# Altium PCB ModdedTSPCB.PcbDoc
Units mm, origin at the board's own origin, x right, y up, seen from the top; angles counter-clockwise.
Board outline 50 x 67 mm, 2 copper layers (Top Layer, Bottom Layer); 51 components, 34 nets, 117 pads, 1 vias.
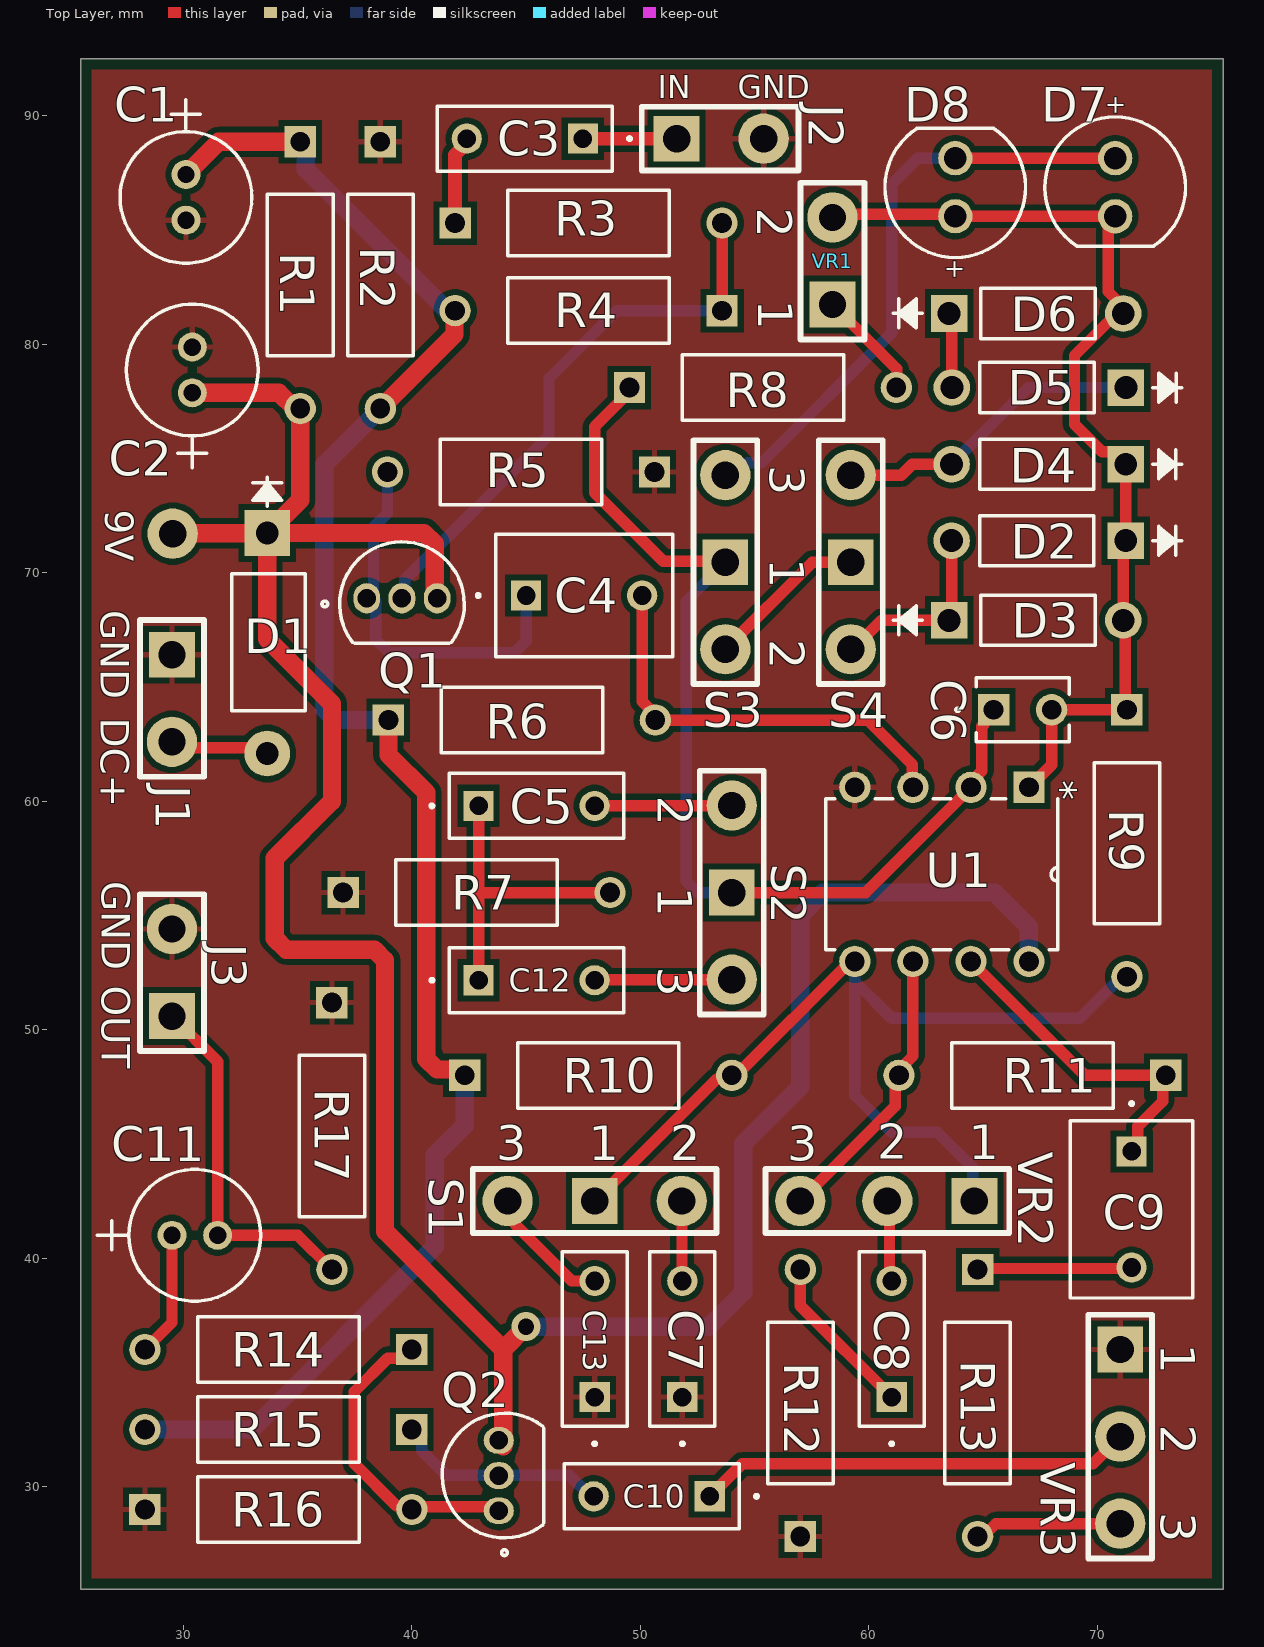
[diagram p0: Top Layer view]
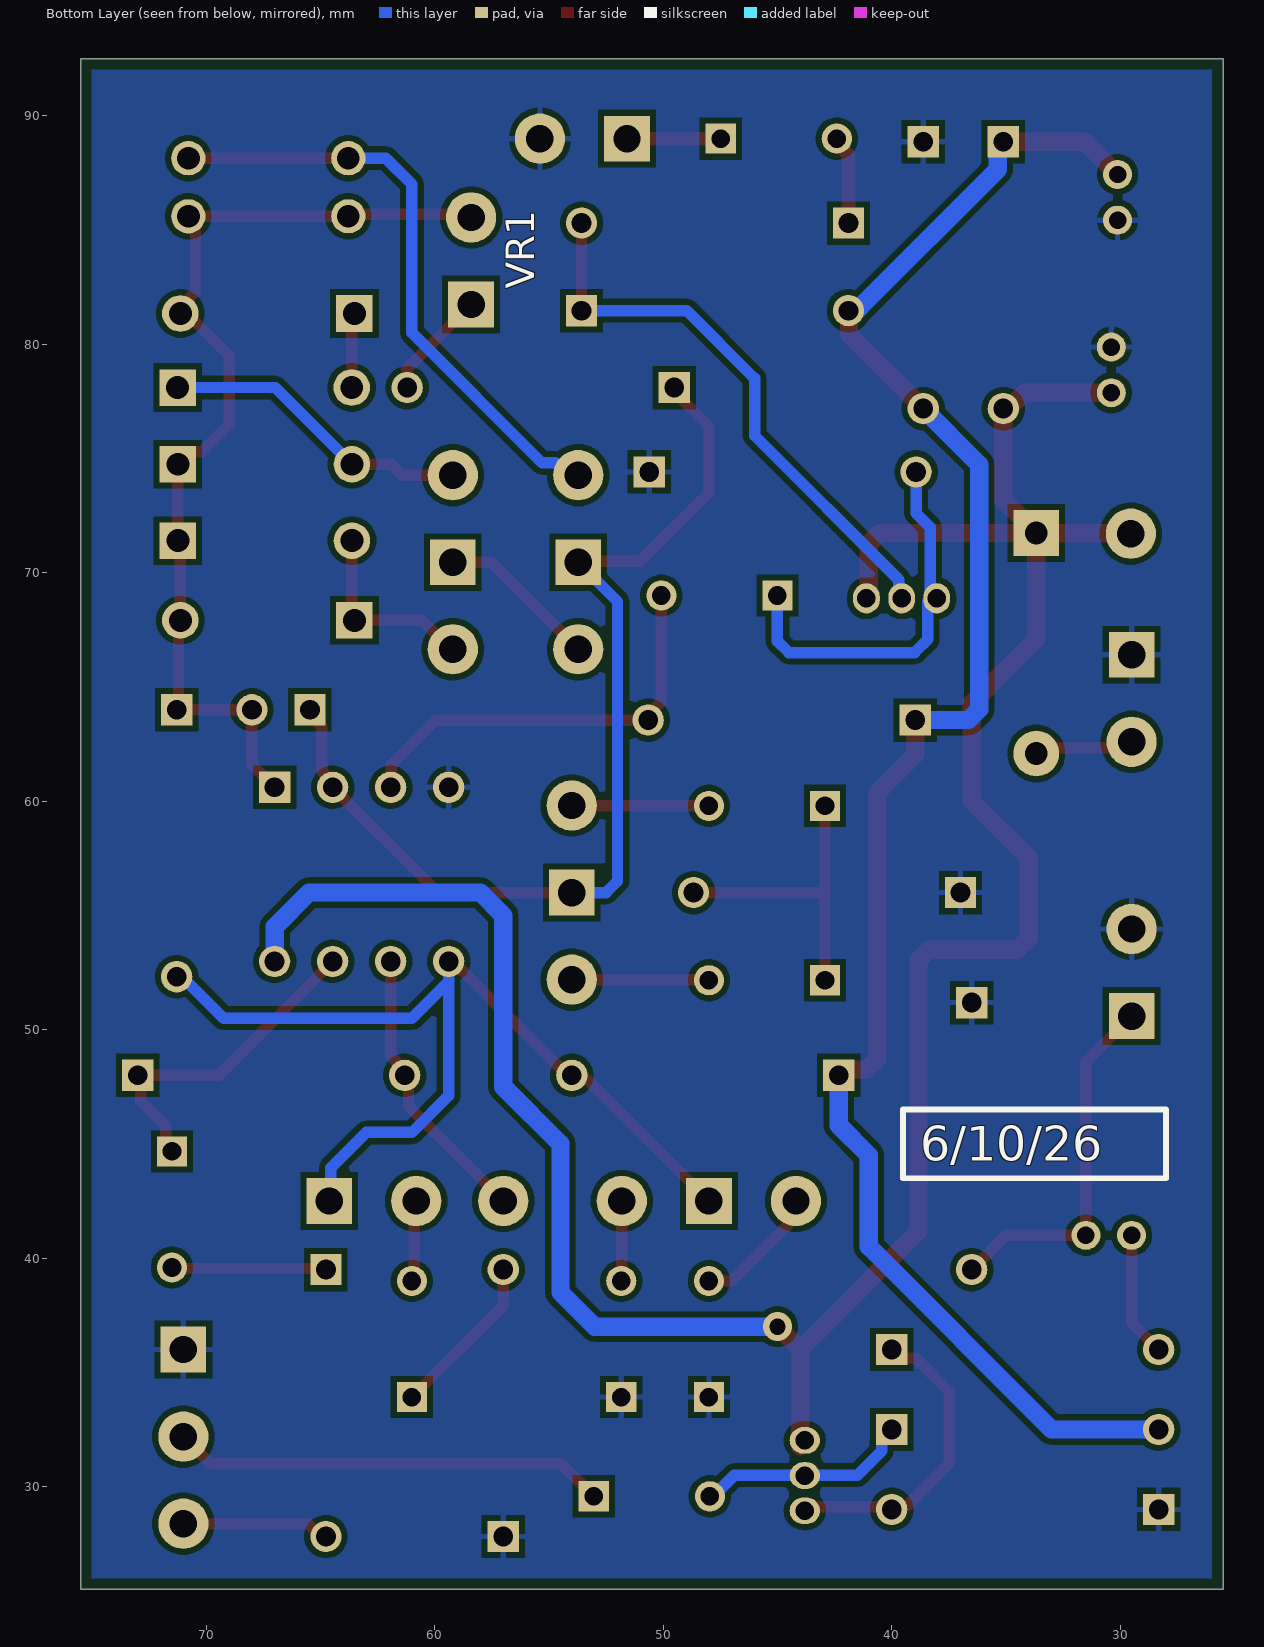
[diagram p1: Bottom Layer view, seen from below]
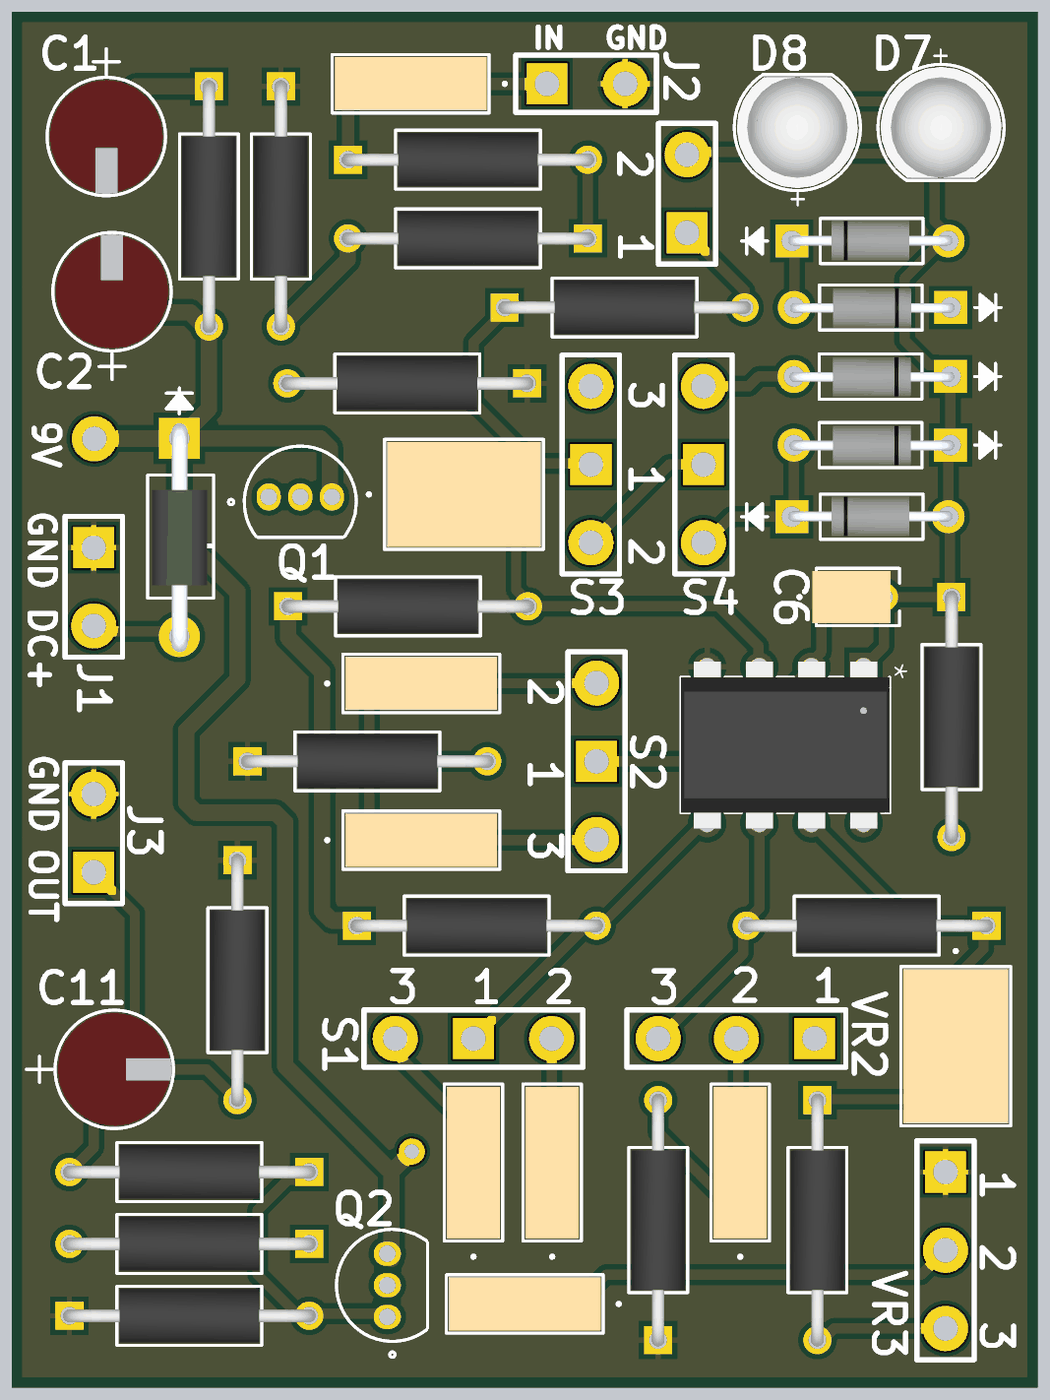
[diagram p2: 3D render of the assembled board from above, using the file's embedded part models]

## Layer stack, top to bottom
Top Solder: solder mask 0.0102, Solder Resist, Dk 3.5
Top Layer: signal copper 0.0356
Dielectric 1: dielectric 0.32, FR-4, Dk 4.8
Bottom Layer: signal copper 0.0356
Bottom Solder: solder mask 0.0102, Solder Resist, Dk 3.5

## Board outline
25.5,25.5 25.5,92.5 75.5,92.5 75.5,25.5

## Design rules (kind name [scope] priority, off if disabled: settings)
BoardOutlineClearance [All] p1: gap=0.381 ignorepadtopadclearanceinfootprint=FALSE
Clearance [All] p1: gap=0.254 ignorepadtopadclearanceinfootprint=FALSE
HoleSize [All] p1: absolutevalues=TRUE maxlimit=2.54 minlimit=0.254 maxpercent=80.000 minpercent=20.000
MinimumAnnularRing [All] p1: minimumring=0.127
PolygonConnect [All] p1: connectstyle=Relief reliefconductorwidth=0.254 reliefentries=4 polygonreliefangle="90 Angle" airgapwidth=0.254
RoutingVias [All] p1: holewidth=0.711 width=1.27 viastyle="Through Hole" minholewidth=0.711 minwidth=1.27 maxholewidth=0.711 maxwidth=1.27
SolderMaskExpansion [All] p1: expansion=0.102 istentingtop=FALSE
SupplyNets "Schematic Supply Nets" [InNet('GND')] p1: voltage=0.000
Width [All] p1: maxlimit=1 minlimit=0.254 preferedwidth=0.5
29 further rules are at their usual default settings.

## Components (designator, comment, footprint, x,y, rotation, side; value= is the part's Value field where it differs from the comment)
C1 "47uF" CAP_35YXJ47M5X11 30.113,87.428 r270 top
C2 "100uF" CAP_25PX100MEFC5X11 30.39,77.873 r90 top
C3 "22nF" CAP_R82EC2220SH50J 47.482,88.996 r180 top
C4 "1uF" CAP_R82DC4100AA60K 45,69 r0 top
C5 "47nF" CAP_R82EC2470SH60J 42.92,59.793 r0 top
C6 "51pF" CAP_C315C510K3G5TA 65.46,64 r0 top
C7 "220nF" CAP_R82DC3220Z360J 51.837,33.92 r90 top
C8 "220nF" CAP_R82DC3220Z360J 61,33.92 r90 top
C9 "1uF" CAP_R82DC4100AA60K 71.5,44.669 r270 top
C10 "100nF" CAP_R82DC3100AA50K 53.038,29.576 r180 top
C11 "10uF" CAP_63PX10MEFC5X11 29.5,41 r0 top
C12 "82nF" CAP_R82EC2820SH60J 42.92,52.162 r0 top
C13 "47nF" CAP_R82EC2470SH60J 48,33.92 r90 top
D1 "1N4007" DIODE_1N4007FFG 33.67,71.735 r270 top
D2 "1N4148" DIODE_1N4148-T50R 71.243,71.4 r180 top
D3 "1N4148" DIODE_1N4148-T50R 63.513,67.914 r0 top
D4 "1N4148" DIODE_1N4148-T50R 71.243,74.742 r180 top
D5 "1N4148" DIODE_1N4148-T50R 71.253,78.103 r180 top
D6 "1N4148" DIODE_1N4148-T50R 63.513,81.344 r0 top
D7 "Red, 2.1V, 60°" LED_151051RS11000 70.782,86.869 r270 top
D8 "Red, 2.1V, 60°" LED_151051RS11000 63.782,86.869 r90 top
J1 "2.1mm DC Jack" DC_POWER_JACK_OFFBOARD 29.5,64.5 r90 top
J2 "Input Jack" JACK_MONO_OFFBOARD 53.49,88.996 r180 top
J3 "Output Jack" JACK_MONO_OFFBOARD 29.5,52.5 r270 top
Q1 "2N5089" BJT_2N5089 38.295,68.876 r0 top
Q2 "2N5089" BJT_2N5089 43.803,29.213 r90 top
R1 "10K" R_MFR-25FRF52-10K 35.115,88.865 r270 top
R2 "10K" R_MFR-25FRF52-10K 38.619,88.865 r270 top
R3 "1K" R_MFR-25FRF52-1K 41.891,85.301 r0 top
R4 "510K" R_MFR-25FTE52-510K 53.575,81.469 r180 top
R5 "10K" R_MFR-25FRF52-10K 50.617,74.407 r180 top
R6 "10K" R_MFR-25FRF52-10K 38.973,63.548 r0 top
R7 "4.7K" R_MFR-25FTE52-4K7 36.989,56 r0 top
R8 "51K" R_MFR-25FTE52-51K 49.521,78.103 r0 top
R9 "1K" R_MFR-25FRF52-1K 71.294,64 r270 top
R10 "10K" R_MFR-25FRF52-10K 42.316,48 r0 top
R11 "1K" R_MFR-25FRF52-1K 73,48 r180 top
R12 "220" R_MFR-25FTE52-220R 57,27.816 r90 top
R13 "1K" R_MFR-25FRF52-1K 64.76,39.5 r270 top
R14 "100" R_MFR-25FRF52-100R 40,36 r180 top
R15 "510K" R_MFR-25FTE52-510K 40,32.5 r180 top
R16 "10K" R_MFR-25FRF52-10K 28.316,29 r0 top
R17 "10K" R_MFR-25FRF52-10K 36.5,51.184 r270 top
S1 "SPDT_TOGGLE_SWITCH_OFFBOARD" SPDT_TOGGLE_SWITCH_OFFBOARD 48,42.5 r0 top (schematic designator SPDT1)
S2 "SPDT_TOGGLE_SWITCH_OFFBOARD" SPDT_TOGGLE_SWITCH_OFFBOARD 54,56 r90 top (schematic designator SPDT2)
S3 "SPDT_TOGGLE_SWITCH_OFFBOARD" SPDT_TOGGLE_SWITCH_OFFBOARD 53.72,70.457 r270 top (schematic designator SPDT3)
S4 "SPDT_TOGGLE_SWITCH_OFFBOARD" SPDT_TOGGLE_SWITCH_OFFBOARD 59.207,70.457 r270 top (schematic designator SPDT4)
U1 "RC4558IP" OPAMP_RC4558IP 59.388,52.986 r270 top
VR1 "A500K" POT_500K_LOG_OFFBOARD 58.409,83.64 r90 top
VR2 "B20K" POT_20K_LIN_OFFBOARD 60.81,42.5 r180 top
VR3 "B100K" POT_100K_LIN_OFFBOARD 71,32.19 r270 top

## Footprints (in the part's own frame and the unit in brackets; to place one, negate y for a bottom-side part, rotate by r counter-clockwise, add the part's x,y. Pads: shape width x height; smd on the part's side, far side on the other; paste and mask are expansions set on the pad)
BJT_2N5089 [mil] "Bipolar (BJT) Transistor NPN 25 V 50 mA 50MHz 625 mW Through Hole TO-92-3"
  oval 46x52 hole 32 paste-99999 mask+0: 1(-10.63,0) 2(50,0) 3(110.63,0)
  silkscreen extent -88,-78 158,97
CAP_25PX100MEFC5X11 [mil] "100 µF 25 V Aluminum Electrolytic Capacitors Radial, Can 1000 Hrs @ 105°C"
  round 50 / inner round 60 / far side round 50 hole 30 paste-99999 mask+0: 1(0,0) 2(78.74,0)
  silkscreen extent -129,-114 153,114, body extent -69,-108 149,108, height 493
CAP_35YXJ47M5X11 [mil] "47 µF 35 V Aluminum Electrolytic Capacitors Radial, Can 5000 Hrs @ 105°C"
  round 50 hole 30 paste-99999 mask+0: 1(0,0) 2(78.74,0)
  silkscreen extent -129,-113 153,114, body extent -69,-108 149,108, height 493
CAP_63PX10MEFC5X11 [mil] "10 µF 63 V Aluminum Electrolytic Capacitors Radial, Can 1000 Hrs @ 105°C"
  round 50 hole 30 paste-99999 mask+0: 1(0,0) 2(78.74,0)
  silkscreen extent -129,-113 153,113, body extent -69,-108 149,108, height 493
CAP_C315C510K3G5TA [mil] "51 pF ±10% 25V Ceramic Capacitor C0G, NP0 Radial"
  rect 54x54 hole 34 paste-99999 mask+0: 1(0,0)
  round 54 hole 34 paste-99999 mask+0: 2(100,0)
  silkscreen extent -65,-55 130,55, body extent -37,-50 113,50, height 180
CAP_R82DC3100AA50K [mil] "0.1 µF Film Capacitor 40V 63V Polyester, Polyethylene Terephthalate (PET), Metallized - Stacked Radial"
  rect 52x52 hole 32 paste-99999 mask+0: 1(0,0)
  round 52 hole 32 paste-99999 mask+0: 2(200,0)
  silkscreen extent -84,-56 250,56, body extent -46,-51 246,51, height 260
CAP_R82DC3220Z360J [mil] "0.22 µF Film Capacitor 40V 63V Polyester, Polyethylene Terephthalate (PET), Metallized - Stacked Radial"
  rect 52x52 hole 32 paste-99999 mask+0: 1(0,0)
  round 52 hole 32 paste-99999 mask+0: 2(200,0)
  silkscreen extent -83,-56 250,56, body extent -46,-51 246,51, height 260
CAP_R82DC4100AA60K [mil] "1 µF Film Capacitor 40V 63V Polyester, Polyethylene Terephthalate (PET), Metallized - Stacked Radial"
  rect 52x52 hole 32 paste-99999 mask+0: 1(0,0)
  round 52 hole 32 paste-99999 mask+0: 2(200,0)
  silkscreen extent -85,-106 252,105, body extent -47,-101 247,101, height 398
CAP_R82EC2220SH50J [mil] "0.022 µF Film Capacitor 63V 100V Polyester, Polyethylene Terephthalate (PET), Metallized - Stacked Radial"
  rect 52x52 hole 32 paste-99999 mask+0: 1(0,0)
  round 52 hole 32 paste-99999 mask+0: 2(200,0)
  silkscreen extent -84,-56 251,56, body extent -46,-51 246,51, height 260
CAP_R82EC2470SH60J [mil] "0.047 µF Film Capacitor 63V 100V Polyester, Polyethylene Terephthalate (PET), Metallized - Stacked Radial"
  rect 52x52 hole 32 paste-99999 mask+0: 1(0,0)
  round 52 hole 32 paste-99999 mask+0: 2(200,0)
  silkscreen extent -83,-56 250,56, body extent -46,-51 246,51, height 260
CAP_R82EC2820SH60J [mil] "0.082 µF Film Capacitor 63V 100V Polyester, Polyethylene Terephthalate (PET), Metallized - Stacked Radial"
  rect 52x52 hole 32 paste-99999 mask+0: 1(0,0)
  round 52 hole 32 paste-99999 mask+0: 2(200,0)
  silkscreen extent -83,-56 250,56, body extent -46,-51 246,51, height 260
DC_POWER_JACK_OFFBOARD [mm] "Through holes for wires to Power Barrel Connector Jack 2.10mm ID (0.083\"), 5.50mm OD (0.217\") Chassis Mount"
  rect 2x2 hole 1.2: 1(1.905,0)
  round 2.2 hole 1.2: 2(-1.905,0)
  silkscreen extent -3.43,-1.4 3.43,1.4
DIODE_1N4007FFG [mm] "Diode 1000 V 1A Through Hole Axial"
  rect 2x2 / inner oval 1.925x1.524 / far side rect 2x2 hole 1 paste-2539.97 mask+0: 1(0,0)
  round 2 / inner round 1.524 / far side round 2 hole 1 paste-2539.97 mask+0: 2(9.652,0)
  silkscreen extent -2.45,-1.54 7.78,1.67, body extent -0.73,-1.34 10.42,1.36, height 2.69
DIODE_1N4148-T50R [mil] "Diode 100 V 200mA Through Hole DO-35"
  rect 63x63 / inner round 60 / far side rect 63x63 hole 39.37 paste-99999 mask+0: 1(0,0)
  round 63 / inner round 60 / far side round 63 hole 39.37 paste-99999 mask+0: 2(300,0)
  silkscreen extent -97,-43 252,43, body extent -7,-37 308,38, height 75
JACK_MONO_OFFBOARD [mm] "Through holes for wires to 6.35mm (0.250\", 1/4\") - Headphone Phone Jack Mono Connector Solder Eyelet(s)"
  rect 2x2 hole 1.2: 1(1.905,0)
  round 2.2 hole 1.2: 2(-1.905,0)
  silkscreen extent -3.43,-1.4 3.43,1.4
LED_151051RS11000 [mm] "Red 645nm LED Indication - Discrete 2.1V Radial"
  round 1.5 hole 1: 1(-1.27,0) 2(1.27,0)
  silkscreen extent -3.07,-3.07 2.58,3.08, body extent -2.95,-2.95 2.45,2.95, height 9.2
OPAMP_RC4558IP [mil] "Standard (General Purpose) Amplifier 2 Circuit Differential 8-PDIP"
  rect 54x54 / inner round 60 / far side rect 54x54 hole 34 paste-99999 mask-27: 1(-300,300)
  round 54 / inner round 60 / far side round 54 hole 34 paste-99999 mask-27: 2(-300,200) 3(-300,100) 4(-300,0) 5(0,0) 6(0,100) 7(0,200) 8(0,300)
  silkscreen extent -280,-50 -20,350, body extent -310,-50 10,350, height 205
POT_20K_LIN_OFFBOARD [mm] "Through holes for wires to B20K, 16mm Potentiometers - 18T Knurled Shaft - Solder Lug"
  rect 2x2 hole 1.2: 1(-3.81,0)
  round 2.2 hole 1.2: 2(0,0) 3(3.81,0)
  silkscreen extent -5.33,-1.4 5.33,1.4
POT_100K_LIN_OFFBOARD [mm] "Through holes for wires to B100K, 16mm Potentiometers - 18T Knurled Shaft - Solder Lug"
  rect 2x2 hole 1.2: 1(-3.81,0)
  round 2.2 hole 1.2: 2(0,0) 3(3.81,0)
  silkscreen extent -5.33,-1.4 5.33,1.4
POT_500K_LOG_OFFBOARD [mm] "Through holes for wires to A500K, 16mm Potentiometers - 18T Knurled Shaft - Solder Lug"
  rect 2x2 hole 1.2: 1(-1.905,0)
  round 2.2 hole 1.2: 2(1.905,0)
  silkscreen extent -3.43,-1.4 3.43,1.4
R_MFR-25FRF52-1K [mil] "1 kOhms ±1% 0.25W, 1/4W Through Hole Resistor Axial Metal Film"
  rect 54x54 / inner round 60 / far side rect 54x54 hole 34 paste-99999 mask+0: 1(0,0)
  round 54 / inner round 60 / far side round 54 hole 34 paste-99999 mask+0: 2(460,0)
  silkscreen extent 91,-56 369,57, body extent -12,-51 472,51, height 103
R_MFR-25FRF52-10K [mil] "10 kOhms ±1% 0.25W, 1/4W Through Hole Resistor Axial Metal Film"
  rect 54x54 / inner round 60 / far side rect 54x54 hole 34 paste-99999 mask+0: 1(0,0)
  round 54 / inner round 60 / far side round 54 hole 34 paste-99999 mask+0: 2(460,0)
  silkscreen extent 91,-57 369,56, body extent -12,-51 472,51, height 103
R_MFR-25FRF52-100R [mil] "100 Ohms ±1% 0.25W, 1/4W Through Hole Resistor Axial Metal Film"
  rect 54x54 / inner round 60 / far side rect 54x54 hole 34 paste-99999 mask+0: 1(0,0)
  round 54 / inner round 60 / far side round 54 hole 34 paste-99999 mask+0: 2(460,0)
  silkscreen extent 91,-56 369,57, body extent -12,-51 472,51, height 103
R_MFR-25FTE52-4K7 [mil] "4.7 kOhms ±1% 0.25W, 1/4W Through Hole Resistor Axial Metal Film"
  rect 54x54 / inner round 60 / far side rect 54x54 hole 34 paste-99999 mask+0: 1(0,0)
  round 54 / inner round 60 / far side round 54 hole 34 paste-99999 mask+0: 2(460,0)
  silkscreen extent 91,-56 369,57, body extent -12,-51 472,51, height 103
R_MFR-25FTE52-51K [mil] "51 kOhms ±1% 0.25W, 1/4W Through Hole Resistor Axial Metal Film"
  rect 54x54 / inner round 60 / far side rect 54x54 hole 34 paste-99999 mask+0: 1(0,0)
  round 54 / inner round 60 / far side round 54 hole 34 paste-99999 mask+0: 2(460,0)
  silkscreen extent 91,-57 369,56, body extent -12,-51 472,51, height 103
R_MFR-25FTE52-220R [mil] "220 Ohms ±1% 0.25W, 1/4W Through Hole Resistor Axial Metal Film"
  rect 54x54 / inner round 60 / far side rect 54x54 hole 34 paste-99999 mask+0: 1(0,0)
  round 54 / inner round 60 / far side round 54 hole 34 paste-99999 mask+0: 2(460,0)
  silkscreen extent 91,-56 369,57, body extent -12,-51 472,51, height 103
R_MFR-25FTE52-510K [mil] "510 kOhms ±1% 0.25W, 1/4W Through Hole Resistor Axial Metal Film"
  rect 54x54 / inner round 60 / far side rect 54x54 hole 34 paste-99999 mask+0: 1(0,0)
  round 54 / inner round 60 / far side round 54 hole 34 paste-99999 mask+0: 2(460,0)
  silkscreen extent 91,-57 369,56, body extent -12,-51 472,51, height 103
SPDT_TOGGLE_SWITCH_OFFBOARD [mm] "Through holes for wires to a Toggle Switch SPDT Panel Mount"
  rect 2x2 hole 1.2: 1(0,0)
  round 2.2 hole 1.2: 2(3.81,0) 3(-3.81,0)
  silkscreen extent -5.33,-1.4 5.33,1.4

## Part data
C1: library part 35YXJ47M5X11, "47 µF 35 V Aluminum Electrolytic Capacitors Radial, Can 5000 Hrs @ 105°C", Manufacturer_Name=Rubycon, Copyright="Copyright (C) 2026 Ultra Librarian. All rights reserved.", Manufacturer_Part_Number=35YXJ47M5X11
C2: library part 25PX100MEFC5X11, "100 µF 25 V Aluminum Electrolytic Capacitors Radial, Can 1000 Hrs @ 105°C", Manufacturer_Name=Rubycon, Copyright="Copyright (C) 2025 Ultra Librarian. All rights reserved.", Manufacturer_Part_Number=25PX100MEFC5X11
C3: library part R82EC2220SH50J, "0.022 µF Film Capacitor 63V 100V Polyester, Polyethylene Terephthalate (PET), Metallized - Stacked Radial", Manufacturer_Name=Kemet, Copyright="Copyright (C) 2026 Ultra Librarian. All rights reserved.", Datasheet=https://content.kemet.com/datasheets/KEM_F3101_R82.pdf, Manufacturer_Part_Number=R82EC2220SH50J, Type="Film Capacitor"
C4 C9: library part R82DC4100AA60K, "1 µF Film Capacitor 40V 63V Polyester, Polyethylene Terephthalate (PET), Metallized - Stacked Radial", Manufacturer_Name=Kemet, Copyright="Copyright (C) 2026 Ultra Librarian. All rights reserved.", Manufacturer_Part_Number=R82DC4100AA60K, Type="Film Capacitor"
C5 C13: library part R82EC2470SH60J, "0.047 µF Film Capacitor 63V 100V Polyester, Polyethylene Terephthalate (PET), Metallized - Stacked Radial", Manufacturer_Name=Kemet, Copyright="Copyright (C) 2026 Ultra Librarian. All rights reserved.", Datasheet=https://content.kemet.com/datasheets/KEM_F3101_R82.pdf, Manufacturer_Part_Number=R82EC2470SH60J, Type="Film Capacitor"
C6: library part C315C510K3G5TA, "51 pF ±10% 25V Ceramic Capacitor C0G, NP0 Radial", Manufacturer_Name=Kemet, Copyright="Copyright (C) 2026 Ultra Librarian. All rights reserved.", Manufacturer_Part_Number=C315C510K3G5TA
C7 C8: library part R82DC3220Z360J, "0.22 µF Film Capacitor 40V 63V Polyester, Polyethylene Terephthalate (PET), Metallized - Stacked Radial", Manufacturer_Name=Kemet, Copyright="Copyright (C) 2026 Ultra Librarian. All rights reserved.", Datasheet=https://content.kemet.com/datasheets/KEM_F3101_R82.pdf, Manufacturer_Part_Number=R82DC3220Z360J, Type="Film Capacitor"
C10: library part R82DC3100AA50K, "0.1 µF Film Capacitor 40V 63V Polyester, Polyethylene Terephthalate (PET), Metallized - Stacked Radial", Manufacturer_Name=Kemet, Copyright="Copyright (C) 2026 Ultra Librarian. All rights reserved.", Datasheet=https://content.kemet.com/datasheets/KEM_F3101_R82.pdf, Manufacturer_Part_Number=R82DC3100AA50K, Type="Film Capacitor"
C11: library part 63PX10MEFC5X11, "10 µF 63 V Aluminum Electrolytic Capacitors Radial, Can 1000 Hrs @ 105°C", Manufacturer_Name=Rubycon, Copyright="Copyright (C) 2025 Ultra Librarian. All rights reserved.", Manufacturer_Part_Number=63PX10MEFC5X11
C12: library part R82EC2820SH60J, "0.082 µF Film Capacitor 63V 100V Polyester, Polyethylene Terephthalate (PET), Metallized - Stacked Radial", Manufacturer_Name=Kemet, Copyright="Copyright (C) 2026 Ultra Librarian. All rights reserved.", Datasheet=https://content.kemet.com/datasheets/KEM_F3101_R82.pdf, Manufacturer_Part_Number=R82EC2820SH60J, Type="Film Capacitor"
D1: library part 1N4007FFG, "Diode 1000 V 1A Through Hole Axial", Manufacturer_Name=onsemi, Manufacturer_Part_Number=1N4007FFG
D2 D3 D4 D5 D6: library part 1N4148-T50R, "Diode 100 V 200mA Through Hole DO-35", Manufacturer_Name=onsemi, Manufacturer_Part_Number=1N4148-T50RCT-ND
D7 D8: library part 151051RS11000, "WL-TMRC Mono-color Round Color, THT, D5.9 x H8.7mm, Red, 2.1V, 60°", Case/Size Code=5mm, Emitting Color=Red, Forward Voltage=2.1V, Manufacturer="Wurth Elektronik", Operating Temperature Max=85°C, Operating Temperature Min=-40°C, Category="Signal LEDs", Chip Technology=AlGaInP, ComponentLink1Description="Website Link", ComponentLink1URL=https://www.we-online.com/redexpert/article/151051RS11000?ad, ComponentLink2Description="Datasheet Link", ComponentLink2URL=https://www.we-online.com/redexpert/spec/151051RS11000?ad, Diameter=5.9mm, Dominant Wavelength=645nm, Height=8.7mm, Luminous Intensity=30mcd, Manufacturer Part Number=151051RS11000, Match Code=WL-TMRC, Mount="Through Hole", Packaging=Bulk, Peak Wavelength=650nm, Viewing Angle=60°
J1: library part DC_POWER_JACK_OFFBOARD, "Power Barrel Connector Jack 2.10mm ID (0.083\"), 5.50mm OD (0.217\") Chassis Mount", Supplier Part Number 1=EJ501A-ND, Supplier 1=DigiKey
J2 J3: library part JACK_MONO_OFFBOARD, "6.35mm (0.250\", 1/4\") - Headphone Phone Jack Mono Connector Solder Eyelet(s)", Supplier Part Number 1=11, Supplier 1="RS (Formerly Allied Electronics)"
Q1 Q2: "Bipolar (BJT) Transistor NPN 25 V 50 mA 50MHz 625 mW Through Hole TO-92-3", Manufacturer_Name="Central Semiconductor", Copyright="Copyright (C) 2025 Ultra Librarian. All rights reserved.", Manufacturer_Part_Number=2N5089, RefDes=RefDes, Type=Type
R1 R2 R5 R6 R10 R16 R17: library part MFR-25FRF52-10K, "10 kOhms ±1% 0.25W, 1/4W Through Hole Resistor Axial Metal Film", Manufacturer_Name=Yageo, Copyright="Copyright (C) 2025 Ultra Librarian. All rights reserved.", Manufacturer_Part_Number=MFR-25FRF52-10K
R3 R9 R11 R13: library part MFR-25FRF52-1K, "1 kOhms ±1% 0.25W, 1/4W Through Hole Resistor Axial Metal Film", Manufacturer_Name=Yageo, Copyright="Copyright (C) 2025 Ultra Librarian. All rights reserved.", Manufacturer_Part_Number=MFR-25FRF52-1K
R4 R15: library part MFR-25FTE52-510K, "510 kOhms ±1% 0.25W, 1/4W Through Hole Resistor Axial Metal Film", Manufacturer_Name=Yageo, Copyright="Copyright (C) 2025 Ultra Librarian. All rights reserved.", Manufacturer_Part_Number=MFR-25FTE52-510K
R7: library part MFR-25FTE52-4K7, "4.7 kOhms ±1% 0.25W, 1/4W Through Hole Resistor Axial Metal Film", Manufacturer_Name=Yageo, Copyright="Copyright (C) 2025 Ultra Librarian. All rights reserved.", Manufacturer_Part_Number=MFR-25FTE52-4K7
R8: library part MFR-25FTE52-51K, "51 kOhms ±1% 0.25W, 1/4W Through Hole Resistor Axial Metal Film", Manufacturer_Name=Yageo, Copyright="Copyright (C) 2025 Ultra Librarian. All rights reserved.", Manufacturer_Part_Number=MFR-25FTE52-51K
R12: library part MFR-25FTE52-220R, "220 Ohms ±1% 0.25W, 1/4W Through Hole Resistor Axial Metal Film", Manufacturer_Name=Yageo, Copyright="Copyright (C) 2025 Ultra Librarian. All rights reserved.", Manufacturer_Part_Number=MFR-25FTE52-220R
R14: library part MFR-25FRF52-100R, "100 Ohms ±1% 0.25W, 1/4W Through Hole Resistor Axial Metal Film", Manufacturer_Name=Yageo, Copyright="Copyright (C) 2025 Ultra Librarian. All rights reserved.", Manufacturer_Part_Number=MFR-25FRF52-100R
S1 S2 S3 S4: "Toggle Switch SPDT Panel Mount"
U1: "Standard (General Purpose) Amplifier 2 Circuit Differential 8-PDIP", Manufacturer_Name="Texas Instruments", Copyright="Copyright (C) 2025 Ultra Librarian. All rights reserved.", Manufacturer_Part_Number=RC4558IP, RefDes=RefDes, Type=Type
VR1: library part POT_500K_LOG_OFFBOARD, "A500K, 16mm Potentiometers - 18T Knurled Shaft - Solder Lug"
VR2: library part POT_20K_LIN_OFFBOARD, "B20K, 16mm Potentiometers - 18T Knurled Shaft - Solder Lug"
VR3: library part POT_100K_LIN_OFFBOARD, "B100K, 16mm Potentiometers - 18T Knurled Shaft - Solder Lug"

## Free pads (board coordinates)
  round 2.2 hole 1.2: 0(29.531,71.707)

## Via types
v1: diameter 1.27, hole 0.711, Top Layer to Bottom Layer, 1 vias

## Nets (pads, with @x,y where several pads share a name; then routed paths per layer and width w, separated by ;. In a path a pad name is that pad's centre, name@x,y a point inside that pad or via, vN(x,y) a via of type N, cw(c..) or ccw(c..) an arc to the next point about the centre after c; other vN are vias at no path point)
4V5: C1.1 R1.1 R2.2 R4.2 R6.1 R10.1 R15.2 | length 80.4
  Top Layer w0.8: C1.1 31.55,88.865 R1.1 ; R2.2 41.866,80.427 41.866,81.443 R4.2 ; R6.1 38.973,62.027 40.63,60.37 40.63,48.72 41.099,48.252 42.064,48.252 R10.1
  Bottom Layer w0.8: R15.2 33,32.5 41,40.5 41,44.5 42.316,45.816 R10.1 ; R1.1 35.359,88.62 35.359,87.641 41.422,81.578 41.782,81.578 R4.2 ; R2.2 36.17,74.732 36.17,64.017 36.639,63.548 R6.1
9V: C2.1 D1.1 pad.0 Q1.3 Q2.3 R1.2 U1.8 | length 115.4
  Top Layer w0.8: pad.0 29.545,71.721 33.656,71.721 D1.1 ; C2.1 34.189,77.873 34.881,77.181 R1.2 35.115,73.179 D1.1 ; Q1.3 41.035,68.947 41.035,69.284 41,69.318 41,71.267 40.531,71.735 D1.1 ; Q2.3@44,31.77 44,36 ; v1(45,37) 44,36 ; D1.1 33.67,67.092 36.5,64.263 36.5,60 34,57.5 34,54 34.5,53.5 38.354,53.5 38.822,53.031 38.822,41.178 44,36
  Bottom Layer w0.8: v1(45,37) 53,37 54.5,38.5 54.5,45 57,47.5 57,55 58,56 65.5,56 67,54.5 67,52.994 U1.8
GND: C1.2 C2.2 C7.1 C13.1 J1.1 J2.2 J3.2 R2.1 R5.1 R7.1 R12.1 R16.1 R17.1 U1.4 VR3.1
NetC3_1: C3.1 J2.1 | length 4.1
  Top Layer w0.6: C3.1 J2.1
NetC3_2: C3.2 R3.1 | length 4.6
  Top Layer w0.305: R3.1 R3.1@42.402,85.812
  Top Layer w0.6: R3.1 41.891,88.29 42.402,88.801 C3.2
NetC4_1: C4.1 Q1.1 R5.2 | length 16.6
  Bottom Layer w0.5: Q1.1@38.295,68.876 38.423,68.749 38.423,67.077 39,66.5 44.5,66.5 45,67 C4.1 ; Q1.1@38.319,68.901 38.319,71.991 38.933,72.605 R5.2
NetC4_2: C4.2 R6.2 U1.3 | length 18.7
  Top Layer w0.5: C4.2 50.08,64.361 50.657,63.784 R6.2 59.952,63.548 61.896,61.604 61.896,60.638 U1.3
NetC5_1: C5.1 C12.1 R7.2 | length 13.3
  Top Layer w0.5: C12.1 C5.1 ; 43,56 R7.2
NetC5_2: C5.2 S2.2 | length 6
  Top Layer w0.5: C5.2 48.008,59.802 53.992,59.802 S2.2
NetC6_1: C6.1 R8.1 S2.1 S3.1 U1.2 | length 45.3
  Top Layer w0.5: R8.1@49.709,78.103 48,76.394 48,73.5 51,70.5 53.677,70.5 S3.1 ; S2.1 59.862,56 U1.2 64.468,60.842 64.946,61.32 64.946,63.271 65.024,63.349 65.024,63.564 C6.1
  Bottom Layer w0.5: S3.1 52,68.737 52,56.5 52.5,56 S2.1
NetC6_2: C6.2 D2.1 D3.2 D4.1 D6.2 D7.2 D8.1 R9.1 U1.1 VR1.2 | length 43.3
  Top Layer w0.5: VR1.2 58.546,85.682 D8.1@63.332,85.682 ; D8.1@63.47,85.599 D7.2@70.47,85.599 ; U1.1 68,61.598 C6.2 R9.1 71.214,64.081 71.214,67.833 D3.2 71.133,71.291 D2.1 D4.1 70.692,75.292 70.208,75.292 69,76.5 69,79.5 70.844,81.344 D6.2 71.133,81.641 70.47,82.304 D7.2@70.47,85.599
NetC7_2: C7.2 S1.2 | length 3.5
  Top Layer w0.5: S1.2 51.823,42.487 51.823,39.013 C7.2
NetC8_1: C8.1 R12.2 | length 7.2
  Top Layer w0.5: R12.2 57,37.92 C8.1
NetC8_2: C8.2 VR2.2 | length 3.6
  Top Layer w0.5: VR2.2 60.905,42.405 60.905,39.095 C8.2
NetC9_1: C9.1 R11.1 U1.7 | length 14.6
  Top Layer w0.5: U1.7 69.454,48 R11.1 72.857,47.857 72.857,46.857 71.775,45.775 71.775,44.944 C9.1
NetC9_2: C9.2 R13.1 | length 6.8
  Top Layer w0.5: R13.1 64.804,39.544 71.456,39.544 C9.2
NetC10_1: C10.1 VR3.2 | length 19
  Top Layer w0.5: C10.1 54.462,31 69.81,31 VR3.2
NetC10_2: C10.2 Q2.2 R15.1 | length 9.5
  Bottom Layer w0.5: R15.1 40.436,32.064 40.436,31.564 41.5,30.5 46.887,30.5 47.812,29.576 C10.2
NetC11_1: C11.1 R14.2 | length 5.5
  Top Layer w0.5: R14.2 29.5,37.184 C11.1
NetC11_2: C11.2 J3.1 R17.2 | length 16
  Top Layer w0.5: J3.1 31.5,48.595 C11.2 35,41 R17.2
NetC12_2: C12.2 S2.3 | length 6
  Top Layer w0.5: C12.2 48.014,52.176 53.986,52.176 S2.3
NetC13_2: C13.2 S1.3 | length 5.7
  Top Layer w0.5: S1.3 44.515,42.175 44.515,41.485 47,39 C13.2
NetD1_2: D1.2 J1.2 | length 4.4
  Top Layer w0.5: J1.2 29.756,62.339 33.414,62.339 D1.2
NetD2_2: D2.2 D3.1 S4.2 | length 8.4
  Top Layer w0.5: S4.2 59.291,66.647 60.557,67.914 D3.1 63.623,68.024 D2.2
NetD4_2: D4.2 D5.1 S4.3 | length 13.6
  Top Layer w0.5: S4.3 61.421,74.267 61.896,74.742 D4.2
  Bottom Layer w0.5: D4.2 66.983,78.103 D5.1
NetD5_2: D5.2 D6.1 | length 3.3
  Top Layer w0.5: D6.1 63.633,81.224 D5.2
NetD7_1: D7.1 D8.2 S3.3 | length 26.3
  Top Layer w0.5: D8.2@63.47,88.139 D7.1@70.47,88.139
  Bottom Layer w0.5: S3.3 54.18,74.267 54.715,74.802 55.302,74.802 61,80.5 61,87 62.139,88.139 D8.2@63.47,88.139
NetQ1_2: Q1.2 R3.2 R4.1 | length 24.9
  Top Layer w0.5: R4.1 R3.2
  Bottom Layer w0.5: Q1.2 39.693,69.004 39.693,69.693 46,76 46,78.5 48.969,81.469 R4.1
NetQ2_1: Q2.1 R14.1 R16.2 | length 13.9
  Top Layer w0.5: R14.1 39.62,35.62 38.948,35.62 37.486,34.158 37.486,31 39.319,29.167 39.833,29.167 R16.2 40.115,29.115 43.885,29.115 Q2.1@44,29.23
NetR8_2: R8.2 VR1.1 | length 4.9
  Top Layer w0.5: VR1.1 61.226,78.918 61.226,78.269 R8.2@61.393,78.103
NetR9_2: R9.2 R10.2 S1.1 U1.5 VR2.1 | length 42.9
  Top Layer w0.5: S1.1 53.333,47.833 53.833,47.833 R10.2 54.201,48 59.187,52.986 U1.5
  Bottom Layer w0.5: U1.5 59.388,52.112 ; VR2.1 64.543,42.577 64.543,43.957 63,45.5 61,45.5 59.388,47.112 59.388,52.112 ; R9.2 71.059,52.316 69.243,50.5 61,50.5 59.388,52.112
NetR11_2: R11.2 U1.6 VR2.3 | length 12.5
  Top Layer w0.5: VR2.3 61.149,46.649 61.149,47.833 R11.2 61.316,48.236 61.928,48.848 U1.6
NetR13_2: R13.2 VR3.3 | length 6.5
  Top Layer w0.5: R13.2 64.996,27.816 65.56,28.38 VR3.3
NetS3_2: S3.2 S4.1 | length 7.1
  Top Layer w0.5: S3.2 57.53,70.457 S4.1

## Polygon pours and split planes (outlines as drawn)
GND on Top Layer "Top GND Pour" (solid, remove dead copper, pour order 1): 26,92 75,92 75,26 26,26
GND on Bottom Layer "Btm GND Pour" (solid, remove dead copper, pour order 0): 26,92 75,92 75,26 26,26

## Silkscreen, mask and mechanical layers (free items; w line width, h text height)
Top Overlay:
  text "9V" at 26.583,72.744 h1.25 r270
Bottom Overlay:
  lines w0.254: 28,43.5 39.5,43.5 39.5,46.5 28,46.5 28,43.5
  text "6/10/26" at 38.746,44.254 h1.52
Mechanical 15:
  the board outline again, w0.254

## Text inside footprints (layer, text, board x,y; h text height)
D7: Top Overlay "+" at 70.452,90.919 h0.8 r270
D8: Top Overlay "+" at 64.112,82.819 h0.8 r90
J1: Top Overlay "GND" at 26.377,68.35 h1.25 r270; Top Overlay "DC+" at 26.377,63.658 h1.25 r270
J2: Top Overlay "IN" at 50.754,90.754 h1; Top Overlay "GND" at 54.254,90.754 h1
J3: Top Overlay "OUT" at 26.433,51.917 h1.25 r270; Top Overlay "GND" at 26.433,56.498 h1.25 r270
S1: Top Overlay "3" at 43.682,44.278 h1.52; Top Overlay "2" at 51.302,44.278 h1.52; Top Overlay "1" at 47.746,44.278 h1.52
S2: Top Overlay "3" at 50.754,52.746 h1.52 r270; Top Overlay "2" at 50.754,60.246 h1.52 r270; Top Overlay "1" at 50.754,56.246 h1.52 r270
S3: Top Overlay "3" at 55.666,74.696 h1.52 r270; Top Overlay "2" at 55.666,67.076 h1.52 r270; Top Overlay "1" at 55.666,70.632 h1.52 r270
U1: Mechanical 13 "*" at 67.821,60.923 h1.27 r270; Top Overlay "*" at 67.821,60.923 h1.27 r270
VR1: Top Overlay "2" at 55.12,85.967 h1.52 r270; Top Overlay "1" at 55.154,81.939 h1.52 r270
VR2: Top Overlay "3" at 56.42,44.259 h1.52; Top Overlay "2" at 60.367,44.351 h1.52; Top Overlay "1" at 64.373,44.333 h1.52
VR3: Top Overlay "1" at 72.778,36.254 h1.52 r270; Top Overlay "2" at 72.778,32.698 h1.52 r270; Top Overlay "3" at 72.778,28.888 h1.52 r270